# EAGLE board PATHS 1.1 PCB3 (EAGLE 6.5.0)
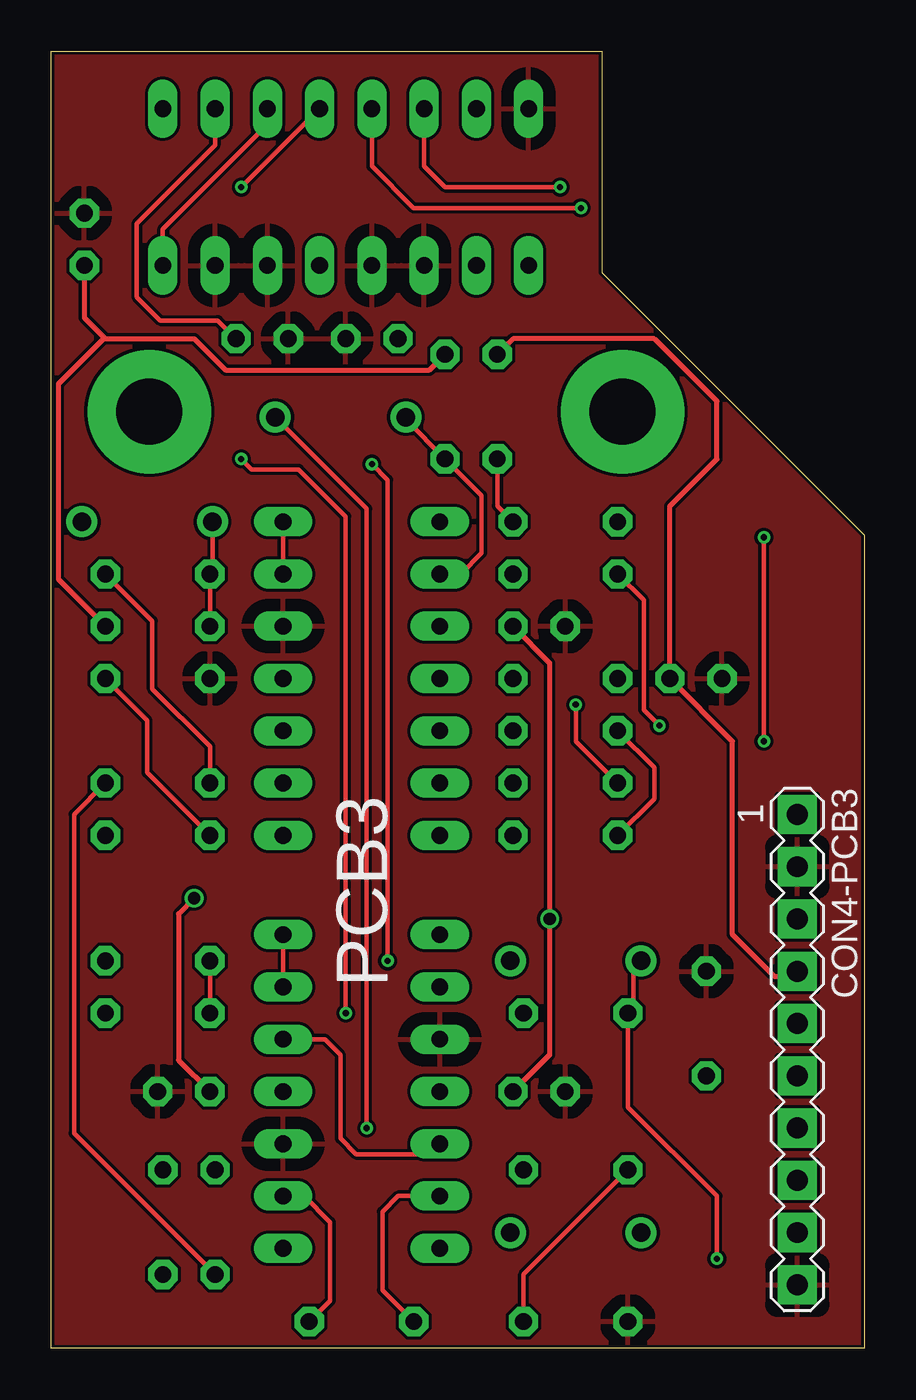
[diagram p0: board, top side]
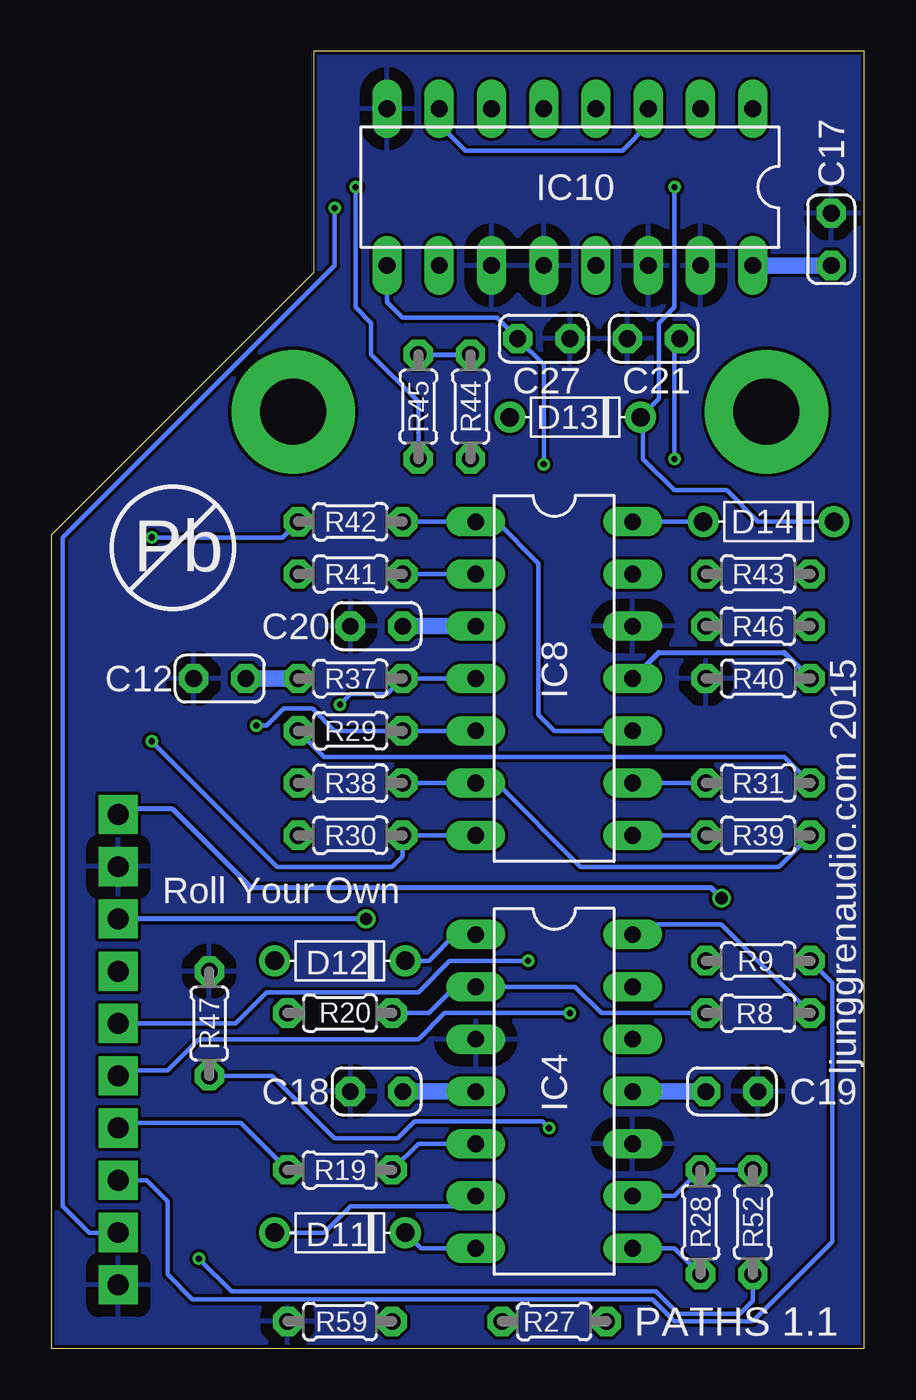
[diagram p1: board, bottom side, seen from below]

Size 39.5 x 63 mm. Coordinates in mm from the lower left corner, seen from the top.
Outline: 39.5,39.5 39.5,0 0,0 0,63 26.75,63 26.75,52.25 39.5,39.5
Copper layers (1*16): Top 0.035mm / dielectric 1.5mm / Bottom 0.035mm
Design rules "hackvana 12 mil pads 24 mil thermal": minimum track width 6mil, minimum drill 0.3mm, track to track 6mil, track to pad 6mil, pad to pad 6mil, via to via 6mil, smd to smd 0mil, copper to edge 6mil, drill to drill 6mil, minimum pad ring 12mil, minimum via ring 6mil, stop-mask expansion 2mil, vias tented up to drill 100mil, thermal gap 24mil

## Footprints (pad centres in the part's own frame; a part is rotated, then mirrored left to right if it is on the bottom)
C025-024X044 = drill 0.813 octagon: 1 -1.27,0; 2 1.27,0
MA10-1 = drill 1.016 pad 1.9 square: 1 -11.43,0; 2 -8.89,0; 3 -6.35,0; 4 -3.81,0; 5 -1.27,0; 6 1.27,0; 7 3.81,0; 8 6.35,0; 9 8.89,0; 10 11.43,0
DO35-6 = drill 0.9: ANODE 3.175,0; CATHODE -3.175,0
DIL14 = drill 0.813 long: 1 -7.62,-3.81; 2 -5.08,-3.81; 3 -2.54,-3.81; 4 0,-3.81; 5 2.54,-3.81; 6 5.08,-3.81; 7 7.62,-3.81; 8 7.62,3.81; 9 5.08,3.81; 10 2.54,3.81; 11 0,3.81; 12 -2.54,3.81; 13 -5.08,3.81; 14 -7.62,3.81
DIL16 = drill 0.813 long: 1 -8.89,-3.81; 2 -6.35,-3.81; 3 -3.81,-3.81; 4 -1.27,-3.81; 5 1.27,-3.81; 6 3.81,-3.81; 7 6.35,-3.81; 8 8.89,-3.81; 9 8.89,3.81; 10 6.35,3.81; 11 3.81,3.81; 12 1.27,3.81; 13 -1.27,3.81; 14 -3.81,3.81; 15 -6.35,3.81; 16 -8.89,3.81
0204/5 = drill 0.813 octagon: 1 -2.54,0; 2 2.54,0

## Placement (x,y rotation side)
C12  100nF  [C025-024X044]  31.32,32.53 0 bottom
C17  100nF  [C025-024X044]  1.6,53.87 90 bottom
C18  100nF  [C025-024X044]  23.7,12.47 180 bottom
C19  100nF  [C025-024X044]  6.43,12.47 180 bottom
C20  100nF  [C025-024X044]  23.7,35.07 180 bottom
C21  100nF  [C025-024X044]  10.24,49.04 180 bottom
C27  100nF  [C025-024X044]  15.57,49.04 180 bottom
CON4-PCB3  [MA10-1]  36.25,14.5 270 top
D11  1N4148  [DO35-6]  25.48,5.61 180 bottom
D12  1N4148  [DO35-6]  25.48,18.82 180 bottom
D13  1N4148  [DO35-6]  14.05,45.23 180 bottom
D14  1N4148  [DO35-6]  4.65,40.15 180 bottom
IC4  TL084  [DIL14]  15.07,12.47 270 bottom
IC8  LM339  [DIL14]  15.07,32.53 270 bottom
IC10  4043N  [DIL16]  14.3,56.41 180 bottom
R8  100k  [0204/5]  5.16,16.28 0 bottom
R9  100k  [0204/5]  5.16,18.82 0 bottom
R19  22k  [0204/5]  25.48,8.66 0 bottom
R20  100k  [0204/5]  25.48,16.28 180 bottom
R27  100k  [0204/5]  15.07,1.29 0 bottom
R28  100k  [0204/5]  7.95,6.12 270 bottom
R29  3.3k  [0204/5]  24.97,29.99 0 bottom
R30  3.3k  [0204/5]  24.97,24.91 0 bottom
R31  3.3k  [0204/5]  5.16,27.45 180 bottom
R37  3.3k  [0204/5]  24.97,32.53 0 bottom
R38  3.3k  [0204/5]  24.97,27.45 0 bottom
R39  3.3k  [0204/5]  5.16,24.91 180 bottom
R40  3.3k  [0204/5]  5.16,32.53 180 bottom
R41  100k  [0204/5]  24.97,37.61 0 bottom
R42  100k  [0204/5]  24.97,40.15 0 bottom
R43  100k  [0204/5]  5.16,37.61 180 bottom
R44  10k  [0204/5]  19.13,45.74 90 bottom
R45  10k  [0204/5]  21.67,45.74 90 bottom
R46  10k  [0204/5]  5.16,35.07 0 bottom
R47  100k  [0204/5]  31.83,15.77 90 bottom
R52  100k  [0204/5]  5.41,6.12 90 bottom
R59  100k  [0204/5]  25.48,1.29 0 bottom

## Library data of the parts
C12 C17-C21 C27 D11-D14 IC4 IC8 IC10 R8 R9 R19 R20 R27-R31 R37-R47 R52 R59 = Roll Your Own
CON4-PCB3 = Roll Your Own; OC_FARNELL: unknown; OC_NEWARK: unknown

## Nets
0V: C12.1 C17.2 C18.2 C19.1 C20.2 C21.2 C27.1 CON4-PCB3.2 CON4-PCB3.10 IC4.3 IC4.10 IC8.12 IC10.8 IC10.11 IC10.12 IC10.14 IC10.15 R40.2 R47.2 R59.1
+5V: C12.2 C17.1 CON4-PCB3.4 IC10.3 IC10.7 IC10.16 R37.1 R44.2 R45.2 R46.2
+12V: C18.1 C20.1 CON4-PCB3.3 IC4.4 IC8.3
-12V: C19.2 CON4-PCB3.1 IC4.11
CV-RECTIFIED-IN-3: CON4-PCB3.7 R19.1 R59.2
CV-STRAIGHT-IN-3: CON4-PCB3.8 R9.2
HLD-3: CON4-PCB3.9 IC10.5
N$29: IC4.2 R8.1 R9.1 R20.1
N$32: IC8.4 R37.2 R38.1
N$33: IC8.6 R38.2 R39.1
N$34: IC8.8 IC8.11 R39.2 R40.1
N$35: D11.ANODE IC4.6 R27.1
N$36: IC8.9 R31.2 R43.1
N$37: IC8.7 R30.2 R42.1
N$38: IC8.5 R29.2 R41.1
N$41: D14.ANODE IC8.13 IC8.14 R43.2 R46.1
N$43: D13.ANODE IC8.2 R41.2 R44.1
N$45: IC4.5 IC4.12 R19.2
N$46: D11.CATHODE IC4.7
N$52: D12.CATHODE IC4.1
N$53: IC4.9 R27.2 R28.1 R52.2
N$54: IC4.8 R28.2 R29.1 R30.1 R31.1
N$58: IC4.13 IC4.14 R8.2
N$59: D12.ANODE R20.2 R52.1
P0-3: D13.CATHODE D14.CATHODE IC10.4 R47.1
P0-H: C21.1 CON4-PCB3.6 IC10.2
P1-3: IC8.1 IC8.10 IC10.6 R42.2 R45.1
P1-H: C27.2 CON4-PCB3.5 IC10.9

## Tracks (layer width: path | path; a pad name or v marks a point on that pad's centre or on a via)
0V
  pour Top: -0.43,62.81 40.21,62.81 40.21,-0.49 -0.43,-0.49
  pour Bottom: -0.43,62.81 39.96,62.81 39.96,-0.49 -0.43,-0.49
+5V
  Top 0.22: IC10.16 5.41,54.38 10.49,59.46 IC10.3
  Top 0.254: R45.2 22.43,49.04 29.3,49.04 32.34,46 32.34,43.19 30.05,40.9 C12.2 33.1,29.48 33.1,20.09 35.13,18.05 35.89,18.05 36.15,18.31 CON4-PCB3.4 | R46.2 0.33,37.36 0.33,46.85 2.53,49.04 2.62,49.04 | 2.62,49.04 6.94,49.04 8.46,47.52 18.37,47.52 R44.2 | C17.1 1.6,50.06 2.62,49.04
  Bottom 0.22: IC10.7 20.65,59.46 19.38,58.19 11.76,58.19 10.49,59.46 IC10.3
  Bottom 0.254: R45.2 R44.2
  Bottom 0.813: R37.1 C12.2 | C17.1 IC10.16
+12V  (via drill 0.6)
  Top 0.254: C20.1 24.21,33.29 v24.21,20.85 24.21,14.24 C18.1
  Bottom 0.254: v24.21,20.85 24.25,20.81 24.29,20.85 CON4-PCB3.3
  Bottom 0.813: C18.1 IC4.4 | C20.1 IC8.3
-12V  (via drill 0.6)
  Top 0.254: v6.94,21.86 6.18,21.1 6.18,13.99 C19.2
  Bottom 0.254: v6.94,21.86 7.45,22.37 29.8,22.37 33.61,26.18 35.64,26.18 35.89,25.93 CON4-PCB3.1
  Bottom 0.813: C19.2 IC4.11
CV-RECTIFIED-IN-3
  Top 0.22: R59.2 22.94,3.58 R19.1
  Bottom 0.22: R19.1 30.31,10.94 35.64,10.94 35.89,10.69 CON4-PCB3.7
CV-STRAIGHT-IN-3
  Bottom 0.22: R9.2 1.54,17.74 1.54,5.16 5.41,1.29 9.22,1.29 10.3,2.37 32.66,2.37 33.86,3.58 33.86,7.13 34.88,8.15 CON4-PCB3.8
HLD-3  (via drill 0.3)
  Top 0.22: v25.73,55.39 17.61,55.39 15.57,57.42 IC10.5
  Bottom 0.22: CON4-PCB3.9 37.67,5.61 38.94,6.88 38.94,39.39 25.73,52.6 v25.73,55.39
N$29
  Top 0.22: R8.1 R9.1
  Bottom 0.22: R20.1 21.16,16.28 19.89,17.55 IC4.2 14.05,17.55 12.78,16.28 R8.1
N$31  (via drill 3.2 pad 6)
  other vias: 4.75,45.5
N$32  (via drill 0.3)
  Top 0.22: R38.1 25.48,29.48 v25.48,31.26
  Bottom 0.22: IC8.4 R37.2 23.19,31.77 24.97,31.77 v25.48,31.26
N$33
  Bottom 0.22: R38.2 IC8.6 17.86,27.45 13.8,23.39 4.14,23.39 R39.1
N$34
  Top 0.22: R39.2 4.65,27.96 4.65,30.5 R40.1
  Bottom 0.22: R39.2 IC8.8
  Bottom 0.254: IC8.11 9.99,33.8 3.89,33.8 R40.1
N$35
  Top 0.22: IC4.6 16.84,7.39 16.08,6.62 16.08,2.81 R27.1
  Bottom 0.22: D11.ANODE 26.24,5.61 24.97,6.88 19.38,6.88 IC4.6
N$36
  Top 0.22: R31.2 7.7,29.23 4.91,32.02 4.91,35.33 R43.1
  Bottom 0.22: R31.2 IC8.9
N$37  (via drill 0.3)
  Top 0.22: v34.62,29.48 v34.62,39.39
  Bottom 0.22: IC8.7 R30.2 22.43,23.9 22.94,23.39 28.53,23.39 v34.62,29.48 | v34.62,39.39 28.27,39.39 R42.1
N$38  (via drill 0.3)
  Top 0.22: v29.54,30.25 28.78,31.01 28.78,36.34 R41.1
  Bottom 0.22: IC8.5 R29.2 25.73,29.99 26.81,31.07 28.21,31.07 29.04,30.25 v29.54,30.25
N$41
  Top 0.22: IC8.13 IC8.14 | D14.ANODE 7.83,37.74 R43.2 R46.1
  Bottom 0.22: IC8.14 D14.ANODE
N$43
  Top 0.22: D13.ANODE 17.23,45.1 R44.1 20.91,41.42 20.91,38.63 19.89,37.61 IC8.2
  Bottom 0.22: IC8.2 R41.2
N$45
  Top 0.22: IC4.12 13.29,15.01 14.05,14.24 14.05,10.18 14.81,9.42 17.86,9.42 18.37,9.93 IC4.5
  Bottom 0.22: R19.2 21.67,9.93 IC4.5
N$46
  Bottom 0.22: D11.CATHODE 21.54,4.85 IC4.7
N$52
  Bottom 0.22: D12.CATHODE 21.16,18.82 19.89,20.09 IC4.1
N$53
  Top 0.22: IC4.9 12.27,7.39 13.54,6.12 13.54,2.31 R27.2
  Bottom 0.22: IC4.9 9.22,7.39 R28.1 R52.2
N$54
  Top 0.22: R31.1 1.1,25.93 1.1,10.43 R28.2 | R30.1 29.29,26.69 29.29,28.21 R29.1
  Bottom 0.22: R28.2 9.22,4.85 IC4.8 | R31.1 3.89,28.72 26.24,28.72 R29.1
N$55  (via drill 3.2 pad 6)
  other vias: 27.75,45.5
N$58
  Top 0.22: IC4.14 IC4.13
  Bottom 0.22: R8.2 6.94,20.59 10.49,20.59 11,20.09 IC4.14
N$59  (via drill 0.3)
  Top 0.22: D12.ANODE 28.27,18.43 28.27,16.53 R20.2 28.02,11.7 32.34,7.39 v32.34,4.34
  Bottom 0.22: R52.1 5.41,2.31 6.05,1.67 9.03,1.67 10.11,2.75 30.75,2.75 v32.34,4.34
P0-3  (via drill 0.3)
  Top 0.22: v15.32,10.69 15.32,40.79 D13.CATHODE | IC10.4 v9.22,56.41
  Bottom 0.22: D14.CATHODE 5.16,40.15 6.68,41.68 9.22,41.68 10.75,43.2 10.75,45.1 D13.CATHODE 9.99,46.12 9.99,49.8 9.22,50.57 v9.22,56.41 | v15.32,10.69 15.64,11.01 21.86,11.01 22.69,10.18 25.73,10.18 28.78,13.23 R47.1
P0-H  (via drill 0.3)
  Top 0.22: IC10.2 7.95,58.44 4.14,54.63 4.14,51.07 5.29,49.93 8.08,49.93 C21.1 | v14.3,16.28 14.3,40.41 12.02,42.69 9.73,42.69 v9.22,43.2
  Bottom 0.22: CON4-PCB3.6 36,13.48 33.86,13.48 32.34,15.01 21.67,15.01 20.4,16.28 v14.3,16.28 | v9.22,43.2 9.22,48.79 C21.1
P1-3  (via drill 0.3)
  Top 0.22: R45.1 21.67,40.91 R42.2 | IC10.6 18.11,57.42 19.13,56.41 v24.72,56.41
  Bottom 0.22: R42.2 IC8.1 17.86,40.15 15.83,38.12 15.83,30.75 15.07,29.99 IC8.10 | v24.72,56.41 24.72,50.57 23.96,49.8 23.96,48.28 21.67,45.99 R45.1
P1-H  (via drill 0.3)
  Top 0.22: v16.34,18.82 16.34,42.18 v15.57,42.95
  Bottom 0.22: IC10.9 23.19,50.82 22.43,50.06 17.86,50.06 C27.2 15.57,47.77 v15.57,42.95 | CON4-PCB3.5 30.56,15.77 29.04,17.29 21.67,17.29 20.15,18.82 v16.34,18.82

## Text on the board
tPlace: PCB3
bPlace: Pb | Roll Your Own | ljunggrenaudio.com 2015 | PATHS 1.1